# Altium PCB Arduino_Leonardo-REV3b.pcbdoc
Units mil, origin at the board's own origin, x right, y up, seen from the top; angles counter-clockwise.
Board outline 4223 x 2124.75 mil, 2 copper layers (Top Layer, Bottom Layer); 51 components, 53 nets, 275 pads, 91 vias.
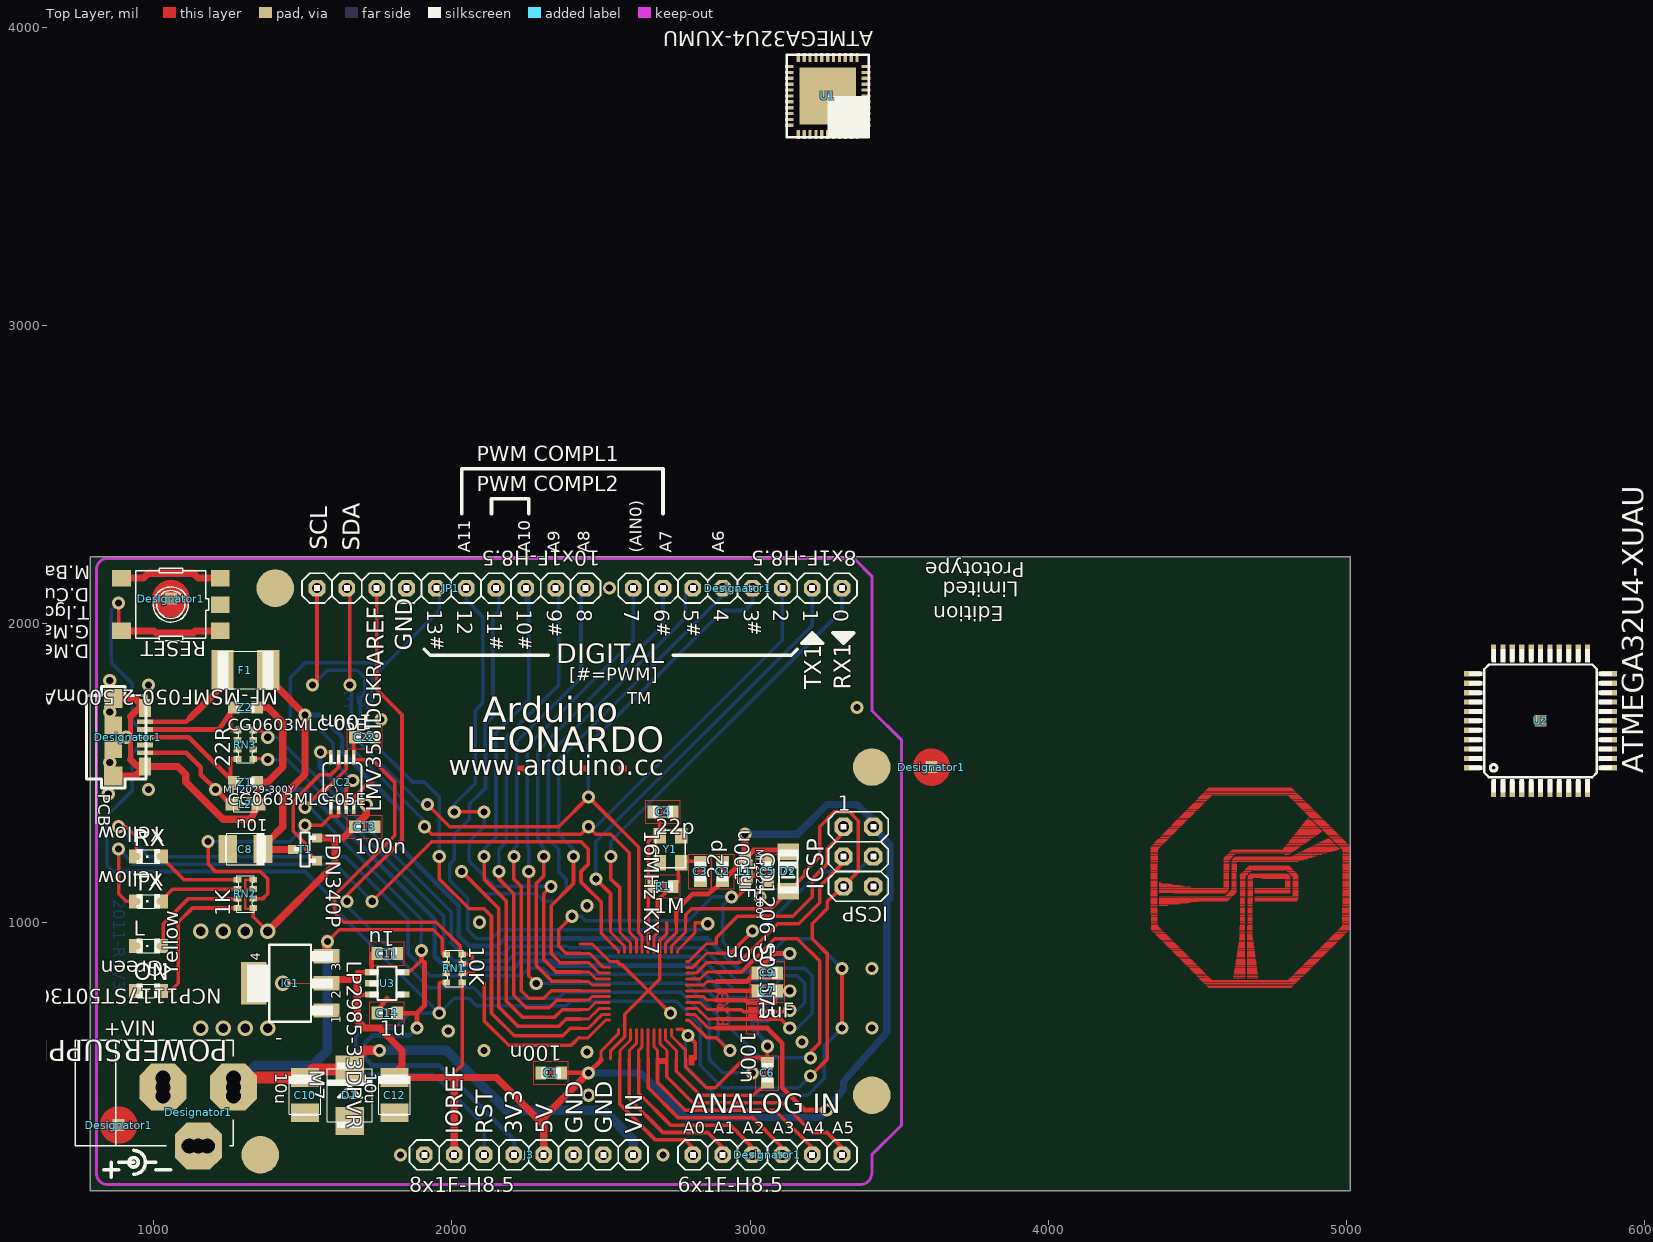
[diagram p0: Top Layer view]
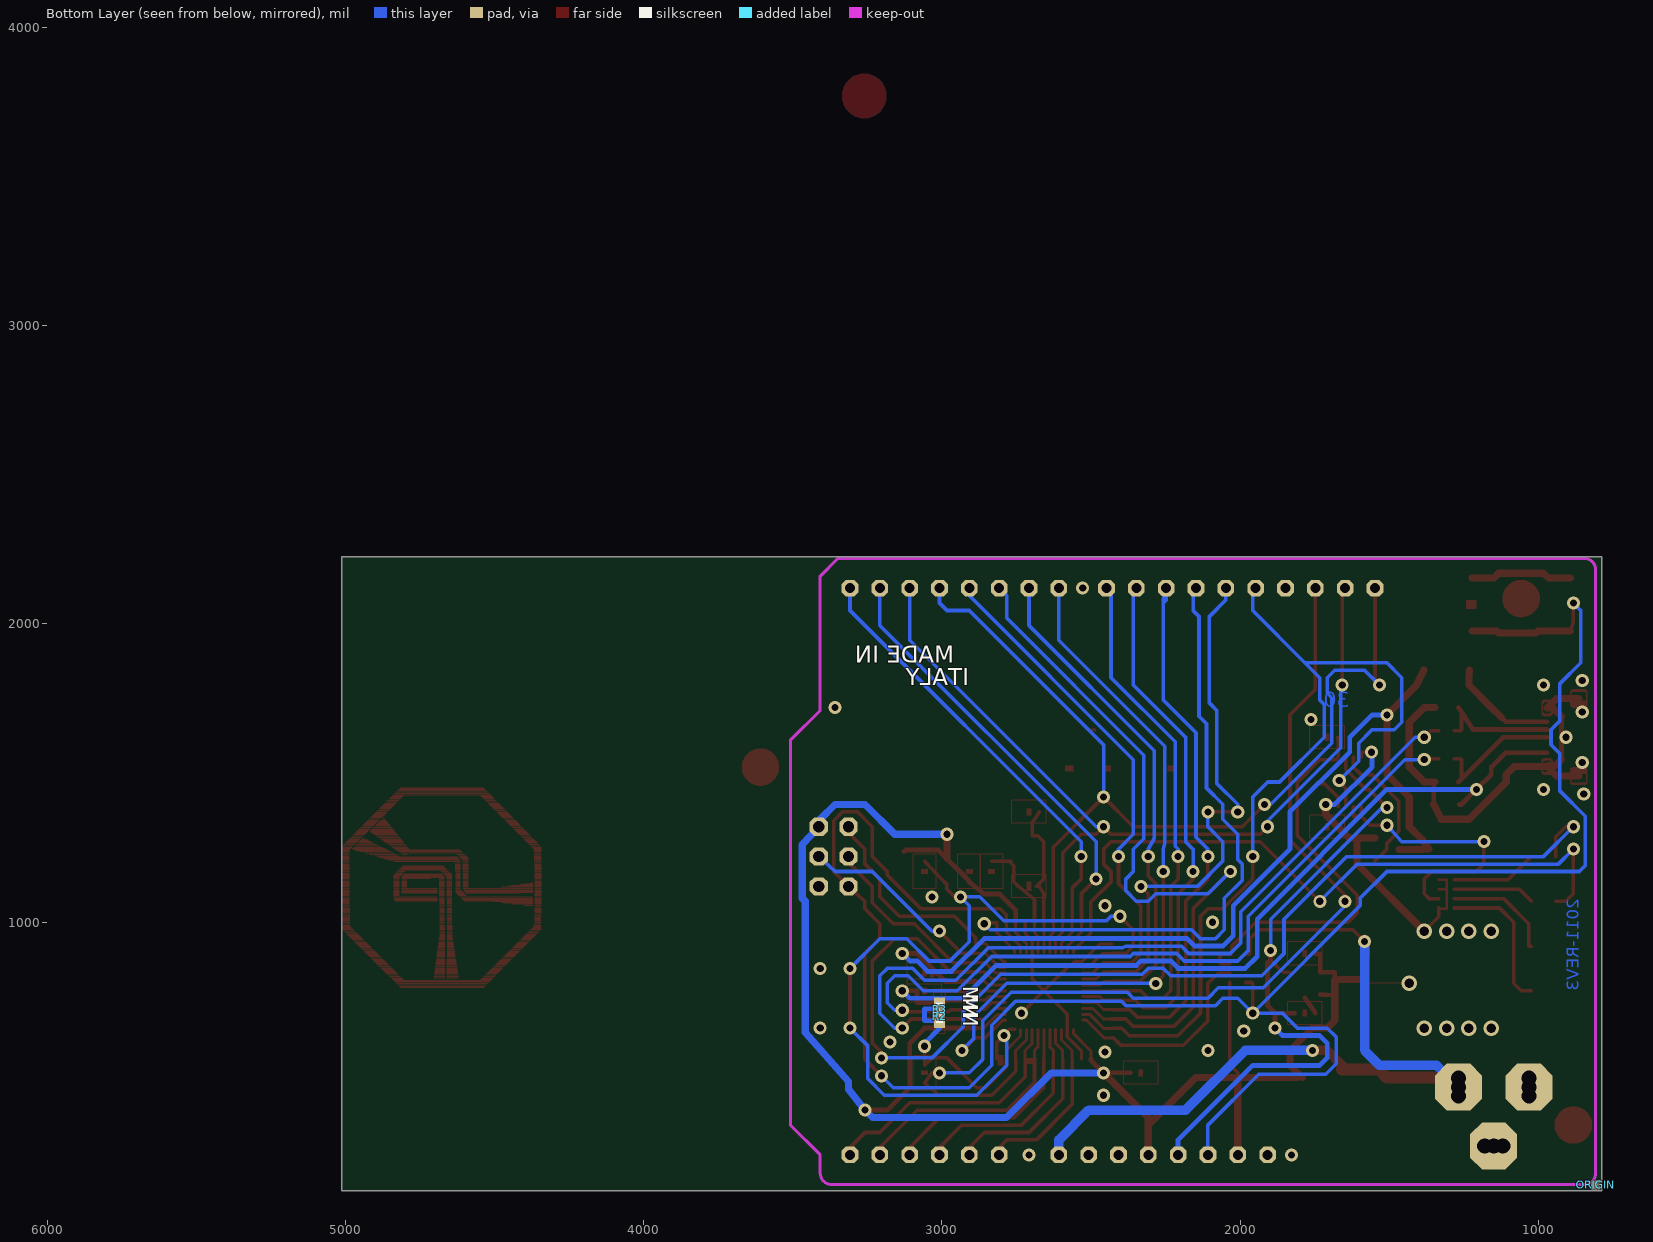
[diagram p1: Bottom Layer view, seen from below]

## Layer stack, top to bottom
Top Layer: signal copper 1.4
Dielectric: dielectric 12.6, FR-4, Dk 4.8
Bottom Layer: signal copper 1.4

## Board outline
788.23,100.25 5011.23,100.25 5011.23,2225 788.23,2225

## Design rules (kind name [scope] priority, off if disabled: settings)
Clearance [All] p1: gap=10
PolygonConnect [All] p1: connectstyle=Relief reliefconductorwidth=10 reliefentries=4 polygonreliefangle="90 Angle" airgapwidth=10
RoutingVias [All] p1: holewidth=28 width=50 viastyle="Through Hole" minholewidth=28 minwidth=50 maxholewidth=28 maxwidth=50
SilkscreenOverComponentPads [All] p1: minsilkscreentomaskgap=10
SolderMaskExpansion [All] p1: expansion=4
Width [All] p1: maxlimit=10 minlimit=10 preferedwidth=10
27 further rules are at their usual default settings.

## Components (designator, comment, footprint, x,y, rotation, side; value= is the part's Value field where it differs from the comment)
C1 "100n" C0603-ROUND 2332.98,495 r180 top
C2 "100n" C0603-ROUND 2907.98,1170 r90 top
C3 "22p" C0603-ROUND 2832.98,1170 r90 top
C4 "22p" C0603-ROUND 2707.98,1370 r0 top
C5 "1uF" C0603-ROUND 3057.98,1170 r270 top
C6 "100n" C0603-ROUND 3057.98,495 r270 top
C7 "1uF" C0603-ROUND 3057.98,770 r0 top
C8 "10u" SMC_B 1307.98,1245 r180 top
C9 "100n" C0603-ROUND 3057.98,830 r180 top
C10 "10u" SMC_B 1507.98,420 r270 top
C11 "1u" C0603-ROUND 1782.98,895 r180 top
C12 "10u" SMC_B 1807.98,420 r270 top
C13 "100n" C0603-ROUND 1707.98,1320 r0 top
C14 "1u" C0603-ROUND 1782.98,695 r0 top
C22 "100n" C0603-ROUND 1707.98,1620 r180 top
D1 "M7" SMB 1657.98,420 r270 top
D2 "CD1206-S01575" MINIMELF 3127.98,1170 r270 top
Designator1 "6x1F-H8.5" 1X06 3057.98,220 r0 top (schematic designator J4)
Designator1 "8x1F-H8.5" 1X08 2957.98,2120 r180 top (schematic designator J2)
Designator1 "Comment" CON2_USB_MICRO_B_AT 864.98,1620 r270 top (schematic designator J1)
Designator1 "Comment" FIDUCIA-MOUNT 882.98,320 r0 top (schematic designator FID3)
Designator1 "Comment" FIDUCIA-MOUNT 3607.98,1520 r0 top (schematic designator FID2)
Designator1 "Comment" FIDUCIA-MOUNT 1057.98,2085 r0 top (schematic designator FID1)
Designator1 "POWERSUPPLY_DC21MMX" POWERSUPPLY_DC-21MM 1017.98,450 r90 top (schematic designator EXTPOWER)
F1 "MF-MSMF050-2 500mA" L1812 1307.98,1845 r180 top
IC1 "NCP1117ST50T3G" SOT223 1457.98,795 r90 top
IC2 "LMV358IDGKR" MSOP08 1632.98,1470 r0 top
ICSP "Comment" 2X03 3362.98,1220 r270 top
J3 "8x1F-H8.5" 1X08 2257.98,220 r0 top
JP1 "10x1F-H8.5" 1X10 1997.98,2120 r180 top
L "Yellow" CHIPLED_0805 982.98,920 r90 top
L1 "MH2029-300Y" 0805 2982.98,1170 r270 top
L2 "MH2029-300Y" 0805 1307.98,1395 r0 top
ON "Green" CHIPLED_0805 982.98,770 r90 top
ORIGIN "Comment" TP-SP 807.98,120 r0 top
R1 "1M" R0603-ROUND 2707.98,1120 r0 top
R2 "NM" R0402 3007.98,684 r90 bottom
R3 "NM" R0402 3007.98,709 r90 bottom
RESET "Comment" TS42 1057.98,2065 r180 top
RN1 "10K" CAY16 2007.98,845 r270 top
RN2 "1K" CAY16 1307.98,1095 r90 top
RN3 "22R" CAY16 1307.98,1595 r90 top
RX "Yellow" CHIPLED_0805 982.98,1220 r90 top
T1 "FDN340P" SOT-23 1507.98,1245 r270 top
TX "Yellow" CHIPLED_0805 982.98,1070 r90 top
U1 "ATMEGA32U4-XUMU" QFN44ML7X7 3260,3770 r180 top
U2 "ATMEGA32U4-XUAU" TQFP44-PAD 5650,1675 r90 top
U3 "LP2985-33DBVR" SOT23-DBV 1782.98,795 r270 top
Y1 "16MHz KX-7" CRYSTAL-3.2-2.5 2732.98,1245 r270 top
Z1 "CG0603MLC-05E" CT/CN0603 1307.98,1470 r0 top
Z2 "CG0603MLC-05E" CT/CN0603 1307.98,1720 r0 top

## Footprints (in the part's own frame and the unit in brackets; to place one, negate y for a bottom-side part, rotate by r counter-clockwise, add the part's x,y. Pads: shape width x height; smd on the part's side, far side on the other; paste and mask are expansions set on the pad)
1X06 [mil]
  oct 56x56 hole 33.46: 1(-250,0) 2(-150,0) 3(-50,0) 4(50,0) 5(150,0) 6(250,0)
  silkscreen extent -300,-50 300,50
1X08 [mil]
  oct 56x56 hole 33.46: 1(-350,0) 2(-250,0) 3(-150,0) 4(-50,0) 5(50,0) 6(150,0) 7(250,0) 8(350,0)
  silkscreen extent -400,-50 400,50
1X10 [mil]
  oct 56x56 hole 33.46: 1(-450,0) 2(-350,0) 3(-250,0) 4(-150,0) 5(-50,0) 6(50,0) 7(150,0) 8(250,0) 9(350,0) 10(450,0)
  silkscreen extent -500,-50 500,50
2X03 [mm]
  oct 1.55x1.55 hole 0.95: 1(-2.54,-1.27) 2(-2.54,1.27) 3(0,-1.27) 4(0,1.27) 5(2.54,-1.27) 6(2.54,1.27)
  silkscreen extent -3.81,-2.54 3.81,2.54
0805 [mm]
  rect 1.2x1 smd: 1(-1.1,0) 2(1.1,0)
  silkscreen extent -1.3,-0.63 1.2,0.63
C0603-ROUND [mil]
  rect 35.37x43.31 smd: 1(-35,0) 2(35,0)
  Top Layer region: -7.87,-11.81 7.87,-11.81 7.87,11.81 -7.87,11.81
  Top Layer lines w2: 57.99,38.7 57.99,-38.7 -57.99,-38.7 -57.99,38.7 57.99,38.7
  silkscreen extent -33,-19 33,19
CAY16 [mm]
  rect 0.5x0.65 smd: 1(-1.2,-0.675) 2(-0.4,-0.675) 3(0.4,-0.675) 4(1.2,-0.675) 5(1.2,0.675) 6(0.4,0.675) 7(-0.4,0.675) 8(-1.2,0.675)
  silkscreen extent -1.55,-0.75 1.55,0.75
CHIPLED_0805 [mm]
  rect 1.2x1.2 smd: A(0,-1.05) C(0,1.05)
  silkscreen extent -0.63,-1 0.63,1
CON2_USB_MICRO_B_AT [mil]
  rect 16x53 smd: P1(-52,106) P2(-26,106) P3(0,106) P4(26,106) P5(52,106)
  rect 65x61 smd: S1(-130,0) S2(130,0)
  rect 60x40 smd: S3(-98,106) S4(98,106)
  rect 60x60 smd: S5(-40,0) S6(40,0)
  round 27.56 smd: ""(-138,-10) ""(-138,10) ""(-103,106) ""(-93,106) ""(93,106) ""(103,106) ""(138,-10) ""(138,10)
  Top Layer lines w5: -121,-25 -121,26 -117,26 ; 154,-23 154,23 ; -155,-23 -155,23 ; 106,23 106,-23 111,-23 111,23 116,23 116,-24 120,-24 ccw(c120,-23) 121,-23 121,24 ; -106,25 -106,-25 -108,-25 -108,25 -112,25 -112,-25 -117,-25 -117,26 ; -116,26 -117,26 ; 114,93 ccw(c114,98) 119,98 119,114 ccw(c114,114) 114,119 ; -82,93 ccw(c-82,98) -77,98 -77,114 ccw(c-82,114) -82,119 ; -114,93 cw(c-114,98) -119,98 -120,113 cw(c-114,113) -114,119 ; 81,94 cw(c81,99) 76,99 76,113 cw(c81,113) 81,118 ; 148,-27 ccw(c148,-17) 158,-17 158,17 ccw(c148,17) 148,27 112,27 ccw(c112,17) 102,17 102,-17 ccw(c112,-17) 112,-27 148,-27 ; -111,-27 ccw(c-111,-17) -101,-17 -101,17 ccw(c-111,17) -111,27 -149,27 ccw(c-149,17) -159,17 -159,-17 ccw(c-149,-17) -149,-27 -111,-27 ; 114,89 ccw(c114,99) 124,99 124,113 ccw(c114,113) 114,123 82,123 ccw(c82,113) 72,113 72,99 ccw(c82,99) 82,89 114,89 ; -82,89 ccw(c-82,99) -72,99 -72,113 ccw(c-82,113) -82,123 -114,123 ccw(c-114,113) -124,113 -124,99 ccw(c-114,99) -114,89 -82,89
  silkscreen extent -170,-90 290,110
CRYSTAL-3.2-2.5 [mm]
  rect 1.3x1.05 smd: 1(-1.15,-0.925) 2(1.15,-0.925) 3(1.15,0.925) 4(-1.15,0.925)
  silkscreen extent -1.6,-1.25 1.6,1.25
CT/CN0603 [mm]
  rect 1x1 smd: 1(-1,0) 2(1,0)
  silkscreen extent -0.75,-0.35 0.75,0.35
FIDUCIA-MOUNT [mil]
  rect 40x40 smd: P$1(0,0)
  Top Layer circle w5: c0,0 r59.06
  Top Layer circle w86: c0,0 r19.68
L1812 [mm]
  rect 1.9x3.4 smd: 1(-1.95,0) 2(1.95,0)
  silkscreen extent -2.39,-1.65 2.4,1.65
MINIMELF [mm]
  rect 1.4x1.8 smd: A(1.7,0) C(-1.7,0)
  silkscreen extent -1.85,-0.86 1.85,0.86
MSOP08 [mm]
  rect 0.3x1.2 smd: 1(-0.976,-2.113) 2(-0.326,-2.113) 3(0.324,-2.113) 4(0.974,-2.113) 5(0.974,2.112) 6(0.324,2.112) 7(-0.326,2.112) 8(-0.976,2.112)
  silkscreen extent -1.63,-2.36 1.62,2.36
POWERSUPPLY_DC-21MM [mm]
  oct 4x4 hole 1.3: 1(-5.08,-3.353) 2(-0.076,-6.35) 3(-0.076,-0.356)
  round 1.95 hole 1.3: 4(-5.08,-4.115) 5(-5.08,-2.591) 6(-0.838,-0.356) 7(0.686,-0.356) 8(-0.838,-6.35) 9(0.686,-6.35)
  silkscreen extent -5.08,-6.35 3.91,7.14
QFN44ML7X7 [mm]
  rect 0.75x0.275 smd: 1(-3.275,2.5) 2(-3.275,2) 3(-3.275,1.5) 4(-3.275,1) 5(-3.275,0.5) 6(-3.275,0) 7(-3.275,-0.5) 8(-3.275,-1) 9(-3.275,-1.5) 10(-3.275,-2) 11(-3.275,-2.5) 23(3.275,-2.5) 24(3.275,-2) 25(3.275,-1.5) 26(3.275,-1) 27(3.275,-0.5) 28(3.275,0) 29(3.275,0.5) 30(3.275,1) 31(3.275,1.5) 32(3.275,2) 33(3.275,2.5)
  rect 0.275x0.75 smd: 12(-2.5,-3.275) 13(-2,-3.275) 14(-1.5,-3.275) 15(-1,-3.275) 16(-0.5,-3.275) 17(0,-3.275) 18(0.5,-3.275) 19(1,-3.275) 20(1.5,-3.275) 21(2,-3.275) 22(2.5,-3.275) 34(2.5,3.275) 35(2,3.275) 36(1.5,3.275) 37(1,3.275) 38(0.5,3.275) 39(0,3.275) 40(-0.5,3.275) 41(-1,3.275) 42(-1.5,3.275) 43(-2,3.275) 44(-2.5,3.275)
  rect 4.826x4.826 smd: EXP(0,0)
  Top Layer circle w1.27: c0,0 r0.635
  Top Layer circle w2.54: c0,0 r0.635
  silkscreen extent -3.5,-3.5 3.5,3.5
R0402 [mm]
  rect 0.7x0.9 smd: 1(-0.65,0) 2(0.65,0)
  Bottom Layer region: -0.2,0.4 0.2,0.4 0.2,-0.4 -0.2,-0.4
  Bottom Layer lines w0.051: -1.473,-0.483 -1.473,0.483 1.473,0.483 1.473,-0.483 -1.473,-0.483
  silkscreen extent -0.55,-0.3 0.56,0.3
R0603-ROUND [mil]
  rect 35.37x43.31 smd: 1(-35,0) 2(35,0)
  Top Layer region: -7.87,-15.75 7.87,-15.75 7.87,15.75 -7.87,15.75
  Top Layer lines w2: -57.99,-38.7 -57.99,38.7 57.99,38.7 57.99,-38.7 -57.99,-38.7
  silkscreen extent -33,-17 33,17
SMB [mm]
  rect 2.4x2.4 smd: A(2.2,0) C(-2.2,0)
  silkscreen extent -2.79,-1.91 2.79,1.91
SMC_B [mm]
  rect 1.6x2.4 smd: +(-1.5,0) -(1.5,0)
  silkscreen extent -1.75,-1.35 1.75,1.35
SOT23-DBV [mm]
  rect 0.55x1.2 smd: 1(-0.95,-1.3) 2(0,-1.3) 3(0.95,-1.3) 4(0.95,1.3) 5(-0.95,1.3)
  silkscreen extent -1.42,-1.5 1.42,1.5
SOT223 [mil]
  rect 48x88 smd: 1(-91,-122) 2(0,-122) 3(91,-122)
  rect 141.73x86.61 smd: 4(0,122.01)
  silkscreen extent -129,-144 129,144
SOT-23 [mil]
  rect 31x35 smd: 1(1,-40) 2(-37,40) 3(39,40)
  silkscreen extent -56,-37 58,37
TP-SP [mm]
  rect 0.8x0.8 smd far side: X(0,0)
TQFP44-PAD [mm]
  rect 1.4x0.45 smd: 1(-5.8,4) 2(-5.8,3.2) 3(-5.8,2.4) 4(-5.8,1.6) 5(-5.8,0.8) 6(-5.8,0) 7(-5.8,-0.8) 8(-5.8,-1.6) 9(-5.8,-2.4) 10(-5.8,-3.2) 11(-5.8,-4) 23(5.8,-4) 24(5.8,-3.2) 25(5.8,-2.4) 26(5.8,-1.6) 27(5.8,-0.8) 28(5.8,0) 29(5.8,0.8) 30(5.8,1.6) 31(5.8,2.4) 32(5.8,3.2) 33(5.8,4)
  rect 0.45x1.4 smd: 12(-4,-5.8) 13(-3.2,-5.8) 14(-2.4,-5.8) 15(-1.6,-5.8) 16(-0.8,-5.8) 17(0,-5.8) 18(0.8,-5.8) 19(1.6,-5.8) 20(2.4,-5.8) 21(3.2,-5.8) 22(4,-5.8) 34(4,5.8) 35(3.2,5.8) 36(2.4,5.8) 37(1.6,5.8) 38(0.8,5.8) 39(0,5.8) 40(-0.8,5.8) 41(-1.6,5.8) 42(-2.4,5.8) 43(-3.2,5.8) 44(-4,5.8)
  rect 1x1 smd: P$1(0,0)
  silkscreen extent -6.1,-6.1 6.1,6.1
TS42 [mm]
  rect 1.6x1.4 smd: 1(-4.2,2.25) 2(4.2,2.25) 3(-4.2,-2.25) 4(4.2,-2.25) 5(-4.2,0)
  Top Layer region: -4.699,-0.381 -3.81,-0.381 -3.81,0.381 -4.699,0.381
  silkscreen extent -3.23,-3.09 2.98,3.09

## Free pads (board coordinates)
  round 125.98 smd: ""(1357.98,220) ""(1407.98,2120) ""(3407.98,420) ""(3407.98,1520)

## Via types
v1: diameter 44, hole 24, Top Layer to Bottom Layer, 82 vias
v2: diameter 52, hole 32, Top Layer to Bottom Layer, 9 vias

## Nets (pads, with @x,y where several pads share a name; then routed paths per layer and width w, separated by ;. In a path a pad name is that pad's centre, name@x,y a point inside that pad or via, vN(x,y) a via of type N, cw(c..) or ccw(c..) an arc to the next point about the centre after c; other vN are vias at no path point)
5-GND: RESET.5
+3V3: C14.2 IC2.6 J3.4 U3.5 | length 2210.6
  Top Layer w12: v1(1507.98,1385) 1567.98,1445 1577.98,1445 1645.74,1512.76 IC2.6 ; U3.5 1855.38,832.4 1897.98,870
  Top Layer w16: C14.2 1882.98,695 ; v1(1882.98,645) 1882.98,695 ; v1(1897.98,905) 1897.98,870 1907.98,865 1907.98,720 1882.98,695
  Bottom Layer w12: v1(1507.98,1385) 1512.98,1385 1517.98,1380 1527.98,1380 1897.98,1010 v1(1897.98,905)
  Bottom Layer w16: v1(1882.98,645) 1857.98,620 1732.98,620 1707.98,595 1707.98,545 1732.98,520 1957.98,520 2207.98,270 J3.4
+5V: C1.1 C2.1 C11.2 C12.+ C13.1 D2.C IC1.2 IC1.4 IC2.8 ICSP.2 J3.2 J3.5 L1.1 RN1.5 RN2.1 RN2.3 RN2.4 T1.2 U1.2 U1.14 U1.34 U2.2 U2.14 U2.34 U3.1 U3.3 | length 7729.5
  Top Layer w0.31: v2(1432.98,795) IC1.2
  Top Layer w8: RN2.1@1331.8,1045 1307.98,1045 1307.98,1110.75 ; RN2.3 1307.98,1110.75 ; RN2.4 1307.98,1142.24 1307.98,1110.75
  Top Layer w10: 2500.5,541.65 2500.5,568.52 2559.55,627.58 2559.55,641.06 ; 2717.04,898.94 2717.04,929.05 2752.47,964.49 2752.47,998.35 ; 2786.92,691.26 2813.72,691.26 2859.98,645 2885.34,645
  Top Layer w12: RN2.1@1331.8,1045 RN2.1 1334.55,1018.43 v2(1382.98,970) ; v1(1559.55,1570) 1594.55,1570 IC2.8 ; 2007.98,479.06 2007.98,495 2034.55,521.58 RN1.5 ; 2885.34,645 2886.33,644.02
  Top Layer w16: 1682.98,755 U3.3 ; 1682.98,807.6 1682.98,832.4 U3.1 1731.8,894.41 C11.2 ; C12.+@1792.04,479.06 C12.+ ; C1.1 v1(2457.98,495) 2500.5,537.52 2500.5,541.65 ; 2752.47,998.35 2752.47,1039.49 2807.98,1095 2858.57,1095 C2.1 2914.08,1144.41 L1.1 3011.6,1241.93 3121.05,1241.93 3122.98,1240 D2.C ; 2885.34,645 3057.98,645 3107.98,595 3107.98,445 3182.98,370 v1(3257.98,370)
  Top Layer w24: v2(1382.98,970) 1607.98,1195 1607.98,1272 1597.98,1282 ; T1.2 1597.98,1282 ; IC1.2 1592.58,807.6 1682.98,807.6 1682.98,755 1682.98,670 1707.98,645 1757.98,645 1832.98,570 1832.98,520 C12.+@1792.04,479.06 ; v1(1712.98,1395) 1712.98,1360 C13.1 1634.98,1282 1597.98,1282 ; C12.+ 2007.98,479.06 ; J3.2 2007.98,479.06 ; J3.5 2307.98,320 ; v1(2457.98,495) 2307.98,345 2307.98,320 ; L1.1 v1(2982.98,1295) ; 2007.98,479.06 2148.92,479.06 2307.98,320
  Bottom Layer w16: v1(1559.55,1570) 1557.98,1558.43 1557.98,1520 1682.98,1395 v1(1712.98,1395)
  Bottom Layer w24: v1(2457.98,495) 2632.98,495 2782.98,345 3232.98,345 v1(3257.98,370) 3312.98,440 3312.98,465 3457.98,630 3457.98,1070 3467.98,1080 3467.98,1260 ICSP.2 3407.98,1345 3357.98,1395 3257.98,1395 3157.98,1295 v1(2982.98,1295)
  other v2: 1157.98,645 1232.98,645 1307.98,645 1382.98,645 1157.98,970 1232.98,970 1307.98,970
A0: Designator1.1@2807.98,220 U1.36 U2.36 | length 595.6
  Top Layer w10: 2563.49,541.65 2563.49,569.51 2598.92,604.95 2598.92,641.06
  Top Layer w12: 2563.49,541.65 2563.49,389.49 2682.98,270 2782.98,270 2807.98,245 Designator1.1@2807.98,220
A1: Designator1.2@2907.98,220 U1.37 U2.37 | length 648.4
  Top Layer w10: 2594.99,541.65 2594.99,570.01 2618.61,593.63 2618.61,641.06
  Top Layer w12: 2594.99,541.65 2594.99,407.99 2707.98,295 2857.98,295 2907.98,245 Designator1.2@2907.98,220
A2: Designator1.3@3007.98,220 U1.38 U2.38 | length 701.1
  Top Layer w10: 2626.48,541.65 2626.48,570.5 2638.29,582.32 2638.29,641.06
  Top Layer w12: 2626.48,541.65 2626.48,426.5 2732.98,320 2932.98,320 3007.98,245 Designator1.3@3007.98,220
A3: Designator1.4@3107.98,220 U1.39 U2.39 | length 753.9
  Top Layer w10: 2657.98,541.65 2657.98,641.06
  Top Layer w12: 2657.98,541.65 2657.98,445 2757.98,345 3007.98,345 3107.98,245 Designator1.4@3107.98,220
A4: Designator1.5@3207.98,220 U1.40 U2.40 | length 816.5
  Top Layer w10: 2677.66,641.06 2677.66,582.32 2689.48,570.5 2689.48,541.65
  Top Layer w12: 2689.48,541.65 2689.48,463.5 2782.98,370 3082.98,370 3207.98,245 Designator1.5@3207.98,220
A5: Designator1.6@3307.98,220 U1.41 U2.41 | length 879
  Top Layer w10: 2697.35,641.06 2697.35,593.63 2720.97,570.01 2720.97,541.65
  Top Layer w12: 2720.97,541.65 2720.97,482.01 2807.98,395 3107.98,395 3207.98,295 3257.98,295 3307.98,245 Designator1.6@3307.98,220
AGND: C6.1 R2.1 U1.43 U2.43 | length 659.7
  Top Layer w10: 2736.72,641.06 2736.72,618.26 2783.96,571.02 2783.96,541.65
  Top Layer w12: 2783.96,541.65 2783.96,514.02 2852.98,445 2882.98,445 2982.98,545 3032.98,545 3057.39,520 C6.1 v1(3057.98,584)
  Bottom Layer w16: R2.1 3007.98,645 3057.98,595 v1(3057.98,584)
AREF: C6.2 JP1.8 U1.42 U2.42 | length 3438
  Top Layer w10: 2717.04,641.06 2717.04,604.95 2752.47,569.51 2752.47,541.65
  Top Layer w12: v1(1647.98,1070) 1647.98,1090 1832.98,1275 1832.98,1695 1747.98,1780 JP1.8 ; 2752.47,541.65 2752.47,500.51 2832.98,420 3008.57,420 C6.2 3033.57,495 v1(3007.98,495)
  Bottom Layer w12: v1(1647.98,1070) 1647.98,1055 1922.98,780 2072.98,780 2107.98,745 2357.98,745 2377.98,765 2767.98,765 2862.98,670 2862.98,540 2907.98,495 v1(3007.98,495)
AVCC: C5.1 L1.2 U1.24 U1.44 U2.24 U2.44 | length 2894.4
  Top Layer w10: 2429.63,895.98 2430.62,895 2461.98,895 2507.98,849 2523.3,849 2529.04,848.74
  Top Layer w12: v1(2402.98,1020) 2357.98,975 2357.98,920 2382,895.98 2429.63,895.98 ; 2756.41,641.06 2772.92,641.06 v1(2791.98,620) 2815.46,596.52 2815.46,541.65 ; v1(2937.98,1085) 2957.98,1085 2982.98,1110 L1.2 3000.7,1144.41 C5.1 ; v1(3307.98,645) v1(3307.98,845)
  Bottom Layer w12: v1(2402.98,1020) 2432.98,1020 2447.98,1005 2792.98,1005 2872.98,1085 v1(2937.98,1085) 2907.98,1055 2907.98,935 2972.98,870 3042.98,870 3117.98,945 3207.98,945 v1(3307.98,845) ; v1(2791.98,620) 2782.98,595 2782.98,520 2882.98,420 3192.98,420 3247.98,475 3247.98,585 v1(3307.98,645)
CMP: C22.2 IC2.5 RN1.7 RN1.8 | length 1353.5
  Top Layer w12: C22.2 1672.98,1614.8 1671.33,1613.15 IC2.5 1679.48,1545 1732.98,1545 1807.98,1470 1807.98,1290 1607.98,1090 1607.98,1030 1637.98,1000 1947.98,1000 2027.98,920 2027.98,898.82 RN1.8 ; RN1.8@2030.22,892.24 RN1.8 ; RN1.7 2063.73,860.75 2067.98,865 2067.98,885 2060.74,892.24 RN1.8
D0/RX: Designator1.1@3307.98,2120 U1.20 U2.20 | length 1569.4
  Top Layer w10: 2563.49,998.35 2563.49,965.49 2598.92,930.05 2598.92,898.94
  Top Layer w12: v1(2532.98,1220) 2532.98,1145 2563.49,1114.49 2563.49,998.35
  Bottom Layer w12: v1(2532.98,1220) 2532.98,1270 3307.98,2045 Designator1.1@3307.98,2120
D1/TX: Designator1.2@3207.98,2120 U1.21 U2.21 | length 1561.2
  Top Layer w10: 2532,998.35 2532,966.98 2579.24,919.74 2579.24,898.94
  Top Layer w12: v1(2482.98,1145) 2532,1095.98 2532,998.35
  Bottom Layer w12: v1(2482.98,1145) 2482.98,1270 3207.98,1995 Designator1.2@3207.98,2120
D2/SDA: Designator1.3@3107.98,2120 JP1.9 U1.19 U2.19 | length 3079.2
  Top Layer w10: 2594.99,998.35 2594.99,966.99 2618.61,943.37 2618.61,898.94
  Top Layer w12: JP1.9 1657.98,2110 v1(1657.98,1795) ; v1(1907.98,1320) 1932.98,1295 2432.98,1295 v1(2457.98,1320) 2482.98,1295 2532.98,1295 2594.99,1232.99 2594.99,998.35
  Bottom Layer w12: v1(1657.98,1795) 1657.98,1790 1662.98,1785 1662.98,1585 1907.98,1340 v1(1907.98,1320) ; v1(2457.98,1320) 2482.98,1320 3107.98,1945 Designator1.3@3107.98,2120
D3/SCL: Designator1.4@3007.98,2120 JP1.10 U1.18 U2.18 | length 3252.2
  Top Layer w10: 2626.48,998.35 2626.48,964.5 2638.29,952.68 2638.29,898.94
  Top Layer w12: v1(1532.98,1795) 1547.98,1810 JP1.10 ; v1(1917.98,1395) 1992.98,1320 2357.98,1320 v1(2457.98,1420) 2626.48,1251.5 2626.48,998.35
  Bottom Layer w12: v1(1532.98,1795) 1582.98,1845 1682.98,1845 1707.98,1820 1707.98,1770 1692.98,1750 1692.98,1600 1897.98,1395 v1(1917.98,1395) ; v1(2457.98,1420) 2457.98,1595 2907.98,2045 2982.98,2045 3007.98,2070 Designator1.4@3007.98,2120
D4: Designator1.5@2907.98,2120 U1.25 U2.25 | length 1728
  Top Layer w10: 2429.63,864.49 2459.49,864.49 2494.92,829.05 2529.04,829.05
  Top Layer w12: v1(2407.98,1220) 2407.98,1130 2332.98,1055 2332.98,895 2363.49,864.49 2429.63,864.49
  Bottom Layer w12: v1(2407.98,1220) 2407.98,1245 2357.98,1295 2357.98,1545 2907.98,2095 Designator1.5@2907.98,2120
D5*: Designator1.6@2807.98,2120 U1.31 U2.31 | length 2576.2
  Top Layer w10: 2429.63,675.51 2458.49,675.51 2493.92,710.95 2529.04,710.95
  Top Layer w12: v1(2032.98,1170) 2157.98,1045 2157.98,715 2222.47,650.51 2358.49,650.51 2383.49,675.51 2429.63,675.51
  Bottom Layer w12: v1(2032.98,1170) 2107.98,1095 2282.98,1095 2307.98,1070 2347.98,1070 2382.98,1105 2382.98,1145 2357.98,1170 2357.98,1245 2322.98,1280 2322.98,1560 2782.98,2020 2782.98,2095 Designator1.6@2807.98,2120
D6*: Designator1.7@2707.98,2120 U1.27 U2.27 | length 1727.8
  Top Layer w10: 2429.63,801.5 2458.48,801.5 2470.29,789.68 2529.04,789.68
  Top Layer w12: v1(2307.98,1220) 2307.98,1155 2282.98,1130 2282.98,855 2336.48,801.5 2429.63,801.5
  Bottom Layer w12: v1(2307.98,1220) 2307.98,1245 2287.98,1280 2287.98,1575 2707.98,1995 Designator1.7@2707.98,2120
D7: Designator1.8@2607.98,2120 U1.1 U2.1 | length 2458.3
  Top Layer w12: v1(2257.98,1170) 2257.98,820 v1(2282.98,795) ; 2786.92,671.58 2796.41,671.58 2855.46,612.52 2886.33,612.52 2928.85,570 v1(2932.98,570)
  Bottom Layer w12: v1(2257.98,1170) 2257.98,1245 2252.98,1265 2252.98,1590 2607.98,1945 Designator1.8@2607.98,2120 ; v1(2282.98,795) 2782.98,795 2892.98,685 2892.98,610 v1(2932.98,570)
D+: Designator1.P3 RN3.8 Z1.1 | length 462.8
  Top Layer w12: Z1.1 1257.98,1484.37 1257.98,1545 1260.74,1547.76 RN3.8
  Top Layer w16: Designator1.P3 1117.98,1620 1192.98,1545 1193.61,1545 Z1.1
D-: Designator1.P2 RN3.5 Z2.1 | length 440.5
  Top Layer w12: Z2.1 1257.98,1705.63 1257.98,1645 1260.74,1642.24 RN3.5
  Top Layer w16: Designator1.P2 1219.61,1646 Z2.1
GATE_CMD: IC2.7 T1.3 | length 465.7
  Top Layer w12: T1.3 1546.98,1206 1507.98,1245 1507.98,1265 1467.98,1305 1467.98,1405 1557.98,1495 1595.15,1495 1620.15,1520 IC2.7
GND: C1.2 C2.2 C3.1 C4.2 C5.2 C8.- C9.1 C10.- C11.1 C12.- C13.2 C14.1 C22.1 D1.A Designator1.1@1149.98,250 Designator1.3@1031.98,447 Designator1.S1 Designator1.S2 Designator1.S3 Designator1.S4 Designator1.S5 Designator1.S6 IC1.1 IC2.4 ICSP.6 J3.6 J3.7 JP1.7 L2.2 L.C ON.C R2.2 R3.1 RESET.3 RESET.4 RN1.2 RN1.3 U1.15 U1.23 U1.35 U1.EXP U2.15 U2.23 U2.35 U2.P$1 U3.2 Y1.2 Y1.4 Z1.2 Z2.2 | length 3071.3
  Top Layer w10: 2429.63,927.48 2469.99,927.48 2529.04,868.42
  Top Layer w11: 2529.04,868.42 2553.55,868.42 ; 2532,541.65 2532,569.02 2579.24,616.26 2579.24,641.06 2579.24,691.26 ; 2697.35,809.37 2697.35,898.94 2697.35,938.37 2720.97,961.99 2720.97,998.35
  Top Layer w12: Designator1.S4@967.98,1525 Designator1.S4 ; IC2.4 1671.33,1418.35 1717.98,1465 1732.98,1465 ; 2553.55,868.42 2563.98,858 2569.98,858 2657.98,770 ; 2579.24,691.26 2657.98,770 ; 2697.35,809.37 2657.98,770 ; v1(2732.98,695) 2657.98,770
  Top Layer w16: 922.98,1545 922.98,1690 ; Z1.2 1351.29,1466.06 L2.2 ; C14.1 1782.98,745.59
  Top Layer w24: Designator1.S2 938.98,1490 Designator1.S4 1080.98,1522 1107.98,1495 1107.98,1470 1232.98,1345 1326.29,1345 L2.2 ; Designator1.S1 938.98,1750 Designator1.S3 950.98,1718 922.98,1690 ; RESET.4 966.56,2153.58 982.98,2170 1132.98,2170 1149.4,2153.58 RESET.3 ; 922.98,1545 942.98,1525 Designator1.S4@967.98,1525 ; Z1.2 1382.98,1470 1432.98,1520 1432.98,1670 1382.98,1720 Z2.2
  Bottom Layer w16: R3.1@3007.98,670 R3.1 R2.2 3057.98,709.59 3057.98,670 R3.1@3007.98,670
  other v1: 1827.98,220 2707.98,220 2457.98,420 2452.98,565 2107.98,570 3173.98,598 1987.98,635 3407.98,645 3407.98,845 2092.98,1000 2452.98,1055 3032.98,1085 847.98,1430 982.98,1445 852.98,1535 907.98,1620 1762.98,1680 852.98,1705 3357.98,1720 982.98,1795 852.98,1810 2527.98,2120
HWB: RN1.6 U1.33 U2.33 | length 702.7
  Top Layer w10: 2429.63,612.52 2456.5,612.52 2515.55,671.58 2529.04,671.58
  Top Layer w12: RN1.6 2073.73,829.25 2107.98,795 2107.98,670 2190.46,587.52 2400.5,587.52 2407.98,595 2425.5,612.52 2429.63,612.52
IO8: JP1.1 U1.28 U2.28 | length 1776.5
  Top Layer w10: 2429.63,770 2529.04,770
  Top Layer w12: v1(2207.98,1220) 2207.98,1145 2232.98,1120 2232.98,770 2257.98,745 2307.98,745 2332.98,770 2429.63,770
  Bottom Layer w12: v1(2207.98,1220) 2207.98,1245 2217.98,1255 2217.98,1605 2432.98,1820 2432.98,2105 JP1.1
IO9*: JP1.2 U1.29 U2.29 | length 1826.2
  Top Layer w10: 2429.63,738.5 2458.48,738.5 2470.29,750.32 2529.04,750.32
  Top Layer w12: v1(2157.98,1170) 2157.98,1145 2207.98,1095 2207.98,755 2249.48,713.5 2326.48,713.5 2351.48,738.5 2429.63,738.5
  Bottom Layer w12: v1(2157.98,1170) 2157.98,1245 2182.98,1270 2182.98,1620 2357.98,1795 2357.98,2110 JP1.2
IO10*: JP1.3 U1.30 U2.30 | length 1899.6
  Top Layer w10: 2429.63,707.01 2457.99,707.01 2481.61,730.63 2529.04,730.63
  Top Layer w12: v1(2107.98,1220) 2107.98,1145 2182.98,1070 2182.98,735 2235.97,682.01 2344.99,682.01 2369.99,707.01 2429.63,707.01
  Bottom Layer w12: v1(2107.98,1220) 2107.98,1245 2147.98,1285 2147.98,1635 2257.98,1745 2257.98,2085 JP1.3@2247.98,2095 ; JP1.3 JP1.3@2247.98,2095 ; 2257.98,2070 2247.98,2080 JP1.3@2247.98,2095
IO11*: JP1.4 U1.12 U2.12 | length 2254.9
  Top Layer w10: 2756.41,898.94 2756.41,905.42 2815.46,964.48 2815.46,998.35
  Top Layer w12: 2815.46,998.35 2861.33,998.35 v1(2857.98,995)
  Bottom Layer w12: JP1.4 2157.98,2110 2157.98,2045 2137.98,2025 2137.98,1690 2112.98,1665 2112.98,1450 2057.98,1395 2057.98,1345 2007.98,1295 2007.98,1210 1992.98,1195 1992.98,1140 2052.98,1080 2052.98,975 2082.98,945 2132.98,945 2162.98,975 2837.98,975 v1(2857.98,995)
IO12: JP1.5 U1.26 U2.26 | length 1911.7
  Top Layer w10: 2429.63,832.99 2459.99,832.99 2483.61,809.37 2529.04,809.37
  Top Layer w12: v1(2007.98,1370) v1(2107.98,1370) ; v1(2332.98,1120) 2307.98,1095 2307.98,875 2349.99,832.99 2429.63,832.99
  Bottom Layer w12: v1(2007.98,1370) 2007.98,1395 2077.98,1465 2077.98,1710 2102.98,1735 2102.98,2025 2047.98,2080 JP1.5 ; v1(2107.98,1370) 2107.98,1320 2057.98,1270 2057.98,1205 2142.98,1120 v1(2332.98,1120)
IO13*: IC2.3 JP1.6 U1.32 U2.32 | length 3128.4
  Top Layer w10: 2429.63,644.02 2457,644.02 2504.24,691.26 2529.04,691.26
  Top Layer w12: IC2.3 1645.74,1447.76 v1(1667.98,1475) ; v1(1957.98,1220) 1957.98,1145 2057.98,1045 2107.98,1045 2132.98,1020 2132.98,695 2208.96,619.02 2372,619.02 2397,644.02 2429.63,644.02
  Bottom Layer w12: v1(1667.98,1475) 1602.98,1540 1602.98,1600 1557.98,1645 1482.98,1645 1457.98,1670 1457.98,1820 1507.98,1870 1782.98,1870 ; JP1.6 1957.98,2110 1957.98,2045 1782.98,1870 ; v1(1957.98,1220) 1957.98,1420 1907.98,1470 1867.98,1470 1717.98,1620 1717.98,1730 1732.98,1745 1732.98,1820 1782.98,1870
LL: IC2.1 IC2.2 RN2.2 | length 938.2
  Top Layer w12: v1(1182.98,1270) 1182.98,1195 1207.98,1170 1357.98,1170 1382.98,1145 1382.98,1095 1367.23,1079.25 RN2.2 ; v1(1507.98,1325) 1564.55,1325 1594.55,1355 ; IC2.1 1594.55,1355 ; IC2.2 1620.15,1355 1594.55,1355
  Bottom Layer w12: v1(1182.98,1270) 1457.98,1270 v1(1507.98,1325)
MISO: ICSP.1 U1.11 U2.11 | length 801.7
  Top Layer w10: 2786.92,868.42 2794.41,868.42 2853.98,928 2886.33,927.48
  Top Layer w12: 2886.33,927.48 2886.33,948.35 2957.98,1020 3142.98,1020 3207.98,1085 3207.98,1145 3257.98,1195 3257.98,1245 3312.98,1300 ICSP.1
MOSI: ICSP.4 U1.10 U2.10 | length 778.1
  Top Layer w10: 2786.92,848.74 2807.72,848.74 2853.98,895 2886.33,895.98
  Top Layer w12: 2886.33,895.98 2933.96,895.98 v1(3007.98,970)
  Bottom Layer w12: v1(3007.98,970) 3032.98,970 3232.98,1170 3357.98,1170 ICSP.4
N$2: L.A RN2.7 | length 367
  Top Layer w12: L.A 1032.98,920 1032.98,995 1117.23,1079.25 RN2.7
N$3: ON.A RN2.8 | length 492.2
  Top Layer w12: ON.A 1057.98,770 1082.98,795 1082.98,1000 1130.74,1047.76 RN2.8
N$6: RN2.6 TX.A | length 274.8
  Top Layer w12: TX.A 1024.32,1071.38 1063.69,1110.75 RN2.6
N$8: RN2.5 RX.A | length 289.3
  Top Layer w12: RX.A 1102.07,1142.24 RN2.5
RD+: RN3.1 U1.4 U2.4 | length 2780.1
  Top Layer w10: 2786.92,730.63 2832.35,730.63 2855.97,707.01 2886.33,707.01
  Top Layer w12: RN3.1 1380.22,1547.76 v1(1382.98,1545) ; 2886.33,707.01 2970.97,707.01 2977.98,700 3127.98,700 v1(3132.98,705) v1@3129.99,702.01
  Bottom Layer w12: v1(1382.98,1545) 1447.98,1545 1972.98,1020 1972.98,905 2007.98,870 2187.98,870 2212.98,895 2357.98,895 2367.98,885 2832.98,885 2947.98,770 3062.98,770 3112.98,820 3157.98,820 3182.98,795 3182.98,730 3157.98,705 v1(3132.98,705)
RD-: RN3.4 U1.3 U2.3 | length 2922.6
  Top Layer w10: 2786.92,710.95 2823.04,710.95 2858.47,675.51 2886.33,675.51
  Top Layer w12: RN3.4 1360.74,1642.24 v1(1382.98,1620) ; 2886.33,675.51 3102.47,675.51 v1(3132.98,645)
  Bottom Layer w12: v1(1382.98,1620) 1412.98,1620 1997.98,1035 1997.98,930 2032.98,895 2172.98,895 2197.98,920 2382.98,920 2392.98,915 2842.98,915 2952.98,805 3057.98,805 3097.98,845 3182.98,845 3207.98,820 3207.98,695 3157.98,645 v1(3132.98,645)
RESET: D2.A ICSP.5 J3.3 RESET.1 RESET.2 RN1.4 U1.13 U2.13 | length 7295.7
  Top Layer w10: 2736.72,898.94 2736.72,919.74 2783.96,966.98 2783.96,998.35
  Top Layer w12: v1(882.98,2070) 882.98,2006.06 RESET.2 ; v1(1957.98,695) 1957.98,795 1960.74,797.76 RN1.4 ; 2783.96,998.35 2783.96,1024.98 2803.98,1045 3069.91,1045 D2.A 3182.98,1158.07 3182.98,1170 3232.98,1220 3232.98,1320 3282.98,1370 3332.98,1370 3362.98,1340 3362.98,1170 ICSP.5 3257.98,1070 3257.98,1045 3207.98,995 3207.98,945 3257.98,895 3257.98,540 v1(3202.98,485)
  Top Layer w24: RESET.2 1001.56,1976.42 1007.98,1970 1132.98,1970 1139.4,1976.42 RESET.1
  Bottom Layer w12: v1(882.98,2070) 857.98,2045 857.98,1870 927.98,1800 927.98,1675 957.98,1645 957.98,1595 927.98,1565 927.98,1440 842.98,1355 842.98,1190 862.98,1170 1507.98,1170 1597.98,1080 1597.98,1055 v1(1957.98,695) ; J3.3 2107.98,320 1937.98,490 1712.98,490 1677.98,525 1677.98,615 1707.98,645 1807.98,645 1857.98,695 v1(1957.98,695) ; v1(3202.98,485) 3162.98,445 2907.98,445 2832.98,520 2832.98,655 2752.98,735 2397.98,735 2382.98,720 2082.98,720 2057.98,745 2007.98,745 v1(1957.98,695)
RXLED: RX.C U1.8 U2.8 | length 3768.1
  Top Layer w10: 2786.92,809.37 2832.35,809.37 2855.97,832.99 2886.33,832.99
  Top Layer w12: v1(882.98,1320) 907.98,1320 941.64,1286.34 RX.C ; 2886.33,832.99 2970.97,832.99 3082.98,945 3157.98,945 3232.98,870 3232.98,595 3202.98,565 v1(3202.98,545)
  Bottom Layer w12: v1(882.98,1320) 982.98,1220 1642.98,1220 1852.98,1010 1852.98,895 1927.98,820 2232.98,820 2257.98,845 2307.98,845 2327.98,825 2802.98,825 2927.98,700 2927.98,650 3032.98,545 v1(3202.98,545)
SCK: ICSP.3 U1.9 U2.9 | length 731.9
  Top Layer w10: 2786.92,829.05 2819.04,829.05 2854.47,864.49 2886.33,864.49
  Top Layer w12: 2886.33,864.49 2962.47,864.49 3092.98,995 3162.98,995 3232.98,1065 3232.98,1120 3312.98,1200 ICSP.3
TXLED: TX.C U1.22 U2.22 | length 2376.6
  Top Layer w10: 2559.55,898.94 2559.55,903.42
  Top Layer w11: 2500.5,998.35 2500.5,962.48 2542.02,920.97 2559.55,903.42
  Top Layer w12: v1(882.98,1245) 882.98,1095 907.98,1070 TX.C ; v1(1732.98,1070) 1932.98,1270 2432.98,1270 2457.98,1245 2457.98,1195 2432.98,1170 2432.98,1135 2500.5,1067.48 2500.5,998.35 ; 2542.02,920.97 2547.74,915.24
  Bottom Layer w12: v1(882.98,1245) 932.98,1195 1607.98,1195 v1(1732.98,1070)
UCAP: C7.1 U1.6 U2.6 | length 236.1
  Top Layer w10: 2786.92,770 2886.33,770
  Top Layer w16: 2886.33,770 C7.1
UGND: C7.2 Designator1.P5 L2.1 R3.2 U1.5 U2.5 | length 3107.9
  Top Layer w10: 2786.92,750.32 2843.66,750.32 2855.48,738.5 2886.33,738.5
  Top Layer w16: Designator1.P5 1109.98,1568 1157.98,1520 1157.98,1495 v1(1207.98,1445) 1257.98,1395 L2.1 ; 2886.33,738.5 2984.48,738.5 2992.98,730 3082.98,730 3082.98,769.41 C7.2 v1(3132.98,770)
  Bottom Layer w16: v1(1207.98,1445) 1507.98,1445 1942.98,1010 1942.98,885 1982.98,845 2207.98,845 2232.98,870 2332.98,870 2347.98,855 2817.98,855 2927.98,745 2997.57,745 R3.2 3007.98,745 3107.98,745 v1(3132.98,770)
USBID: Designator1.P4
VIN: C10.+ D1.C Designator1.2@1267.98,447 IC1.3 J3.8 RN1.1 | length 2918.6
  Top Layer w12: v1(1582.98,935) 1622.98,975 1937.98,975 1967.98,945 1967.98,895 1970.74,892.24 RN1.1
  Top Layer w16: IC1.3 1582.98,889 v1(1582.98,935)
  Top Layer w32: IC1.3 1579.98,942 v1(1582.98,935) ; D1.C 1657.98,520 1707.98,570 v1(1757.98,570)
  Top Layer w40: Designator1.2@1267.98,447 1299.48,478.5 1348.92,479.06 C10.+ ; C10.+@1485.54,479.06 C10.+ ; D1.C 1535.54,506.61 C10.+
  Bottom Layer w32: Designator1.2@1267.98,447 1340.98,520 1532.98,520 1582.98,570 v1(1582.98,935) ; v1(1757.98,570) 1982.98,570 2182.98,370 2507.98,370 2607.98,270 J3.8
VUSB: C8.+ C9.2 F1.1 T1.1 U1.7 U2.7 | length 3437.3
  Top Layer w10: 2786.92,789.68 2844.66,789.68 2856.48,801.5 2886.33,801.5
  Top Layer w12: C9.2 C9.2@3032.98,820.59
  Top Layer w16: 2886.33,801.5 2989.48,801.5 C9.2@3032.98,845 ; C9.2 C9.2@3032.98,845 ; C9.2@3032.98,820.59 C9.2@3032.98,845 ; v1(3132.98,895) 3082.98,895 C9.2@3032.98,845
  Top Layer w24: F1.1 1409.75,1793.23 v1(1507.98,1695) 1507.98,1495 1432.98,1420 1432.98,1320 1392.04,1279.06 C8.+ 1393.04,1244 T1.1
  Bottom Layer w16: v1(1507.98,1695) 1557.98,1695 1632.98,1620 1632.98,1570 1832.98,1370 1832.98,1245 2022.98,1055 2022.98,955 2057.98,920 2152.98,920 2177.98,945 2857.98,945 2967.98,835 3047.98,835 3082.98,870 3107.98,870 v1(3132.98,895)
XTAL1: C4.1 R1.1 U1.17 U2.17 Y1.1 | length 529.3
  Top Layer w10: 2657.98,898.94 2657.98,998.35
  Top Layer w12: 2657.98,998.35 2657.98,1094.41 R1.1 2682.98,1120 2657.98,1145 2657.98,1270 2678.26,1290.28 Y1.1 2696.56,1334.17 C4.1
XTAL2: C3.2 R1.2 U1.16 U2.16 Y1.3 | length 410.7
  Top Layer w10: 2677.66,898.94 2677.66,952.68 2689.48,964.5 2689.48,998.35
  Top Layer w12: 2689.48,998.35 2689.48,1075.91 R1.2 2758.57,1135.59 2758.57,1188.9 Y1.3 2769.4,1205 C3.2
XUSB: Designator1.P1 F1.2 | length 411.1
  Top Layer w16: Designator1.P1 1109.98,1672 1157.98,1720
  Top Layer w24: 1123.96,1685.98 1157.98,1720 1232.98,1795 1232.98,1821.77 F1.2
pads on no net: Designator1. Designator1.4@1179.98,250 Designator1.5@1119.98,250 Designator1.6@1031.98,417 Designator1.7@1031.98,477 Designator1.8@1267.98,417 Designator1.9 Designator1.P$1 J3.1 ORIGIN.X RN3.2 RN3.3 RN3.6 RN3.7 U3.4

## Keep-outs
Keep-Out Layer:
  lines w10: 807.98,159.37 ccw(c847.35,159.37) 847.35,120 3368.61,120 ccw(c3368.61,159.37) 3407.98,159.37 3407.98,220 3507.98,320 3507.98,1610 3407.98,1710 3407.98,2160 3347.98,2220 847.35,2220 ccw(c847.35,2180.63) 807.98,2180.63 807.98,159.37

## Other copper
Top Layer:
  drawing of 12978 lines, arcs and shapes, not listed
Bottom Layer:
  text "30" at 1632.98,1720 h50
  text "2011-REV3" at 865.42,1079.14 h40 r270

## Silkscreen, mask and mechanical layers (free items; w line width, h text height)
Top Overlay:
  circle w12: c932.98,195 r15.81
  lines w2: 1870.48,239.02 1870.48,239.02
  lines w12: 832.98,170 882.98,170 ; 857.98,145 857.98,195 ; 882.98,195 932.98,195 ; 932.98,155 ccw(c932.98,195) 972.98,195 ; 932.98,235 cw(c932.98,195) 972.98,195 ; 1007.98,170 1057.98,170 ; 1007.98,195 972.98,195 ; 1907.98,1915 1927.98,1895 2322.98,1895 ; 2032.98,2370 2032.98,2520 2707.98,2520 2707.98,2370 ; 2132.98,2370 2132.98,2420 2257.98,2420 2257.98,2370 ; 2742.98,1895 3137.98,1895 3157.98,1915 ; 3187.98,1940 3207.98,1960 3227.98,1940 3197.98,1940 3212.98,1950 ; 3292.98,1965 3332.98,1965 3312.98,1945 3297.98,1960 3317.98,1960 ; 3312.98,1950 3312.98,1955 ; 3172.98,1935 3207.98,1970 3242.98,1935 3172.98,1935 ; 3277.98,1970 3312.98,1935 3347.98,1970 3277.98,1970
  text "PWM COMPL1" at 2082.98,2545 h50
  text "PWM COMPL2" at 2082.98,2445 h50
  text "SCL" at 1581.81,2249.48 h56 r90
  text "SDA" at 1691.81,2244.48 h56 r90
  text "A11" at 2062.5,2238.06 h40 r90
  text "A10" at 2262.5,2238.06 h40 r90
  text "A9" at 2362.5,2238.06 h40 r90
  text "A8" at 2462.5,2238.06 h40 r90
  text "(AIN0)" at 2637.5,2238.06 h40 r90
  text "A7" at 2737.5,2238.06 h40 r90
  text "A6" at 2912.5,2238.06 h40 r90
  text "Prototype" at 3921.48,2207 h50 r180
  text "M.Banzi" at 787.98,2195 h45 r180
  text "Limited" at 3900.23,2141 h50 r180
  text "D.Cuartielles" at 784.98,2120 h45 r180
  text "T.Igoe" at 784.98,2060 h45 r180
  text "Edition" at 3849.98,2059.75 h50 r180
  text "13" at 1917.98,2050 h50 r270
  text "12" at 2017.98,2050 h50 r270
  text "11" at 2117.98,2050 h50 r270
  text "10" at 2217.98,2050 h50 r270
  text "9" at 2317.98,2050 h50 r270
  text "8" at 2417.98,2050 h50 r270
  text "7" at 2577.98,2050 h50 r270
  text "6" at 2677.98,2050 h50 r270
  text "5" at 2777.98,2050 h50 r270
  text "4" at 2877.98,2050 h50 r270
  text "3" at 2977.98,2050 h50 r270
  text "2" at 3077.98,2050 h50 r270
  text "1" at 3177.98,2050 h50 r270
  text "0" at 3277.98,2050 h50 r270
  text "G.Martino" at 784.98,1995 h45 r180
  text "#" at 3037.98,1960 h44 r90
  text "#" at 2367.98,1955 h44 r90
  text "#" at 2732.98,1955 h44 r90
  text "#" at 2832.98,1955 h44 r90
  text "D.Mellis" at 784.98,1930 h45 r180
  text "GND" at 1867.23,1910.48 h56 r90
  text "#" at 1972.98,1910 h44 r90
  text "#" at 2172.98,1910 h44 r90
  text "#" at 2267.98,1910 h44 r90
  text "DIGITAL" at 2349.41,1868.59 h66
  text "AREF" at 1771.81,1859.48 h56 r90
  text "[#=PWM]" at 2392.98,1810 h44
  text "TX1" at 3237.81,1780.48 h56 r90
  text "RX1" at 3337.98,1780 h56 r90
  text "TM" at 2587.98,1730 h40
  text "Arduino" at 2102.98,1670 h86
  text "LEONARDO" at 2047.98,1570 h86
  text "www.arduino.cc" at 1988.84,1492.44 h66
  text "1" at 3294.26,1373.91 h50
  text "+VIN" at 832.98,620 h50
  text "-" at 1407.98,590 h50
  text "ANALOG IN" at 2797.98,360 h66
  text "5V" at 2338.5,290.33 h56 r90
  text "GND" at 2438.5,290.33 h56 r90
  text "GND" at 2538.5,290.33 h56 r90
  text "VIN" at 2638.5,290.33 h56 r90
  text "A0" at 2776.04,290.48 h40
  text "A1" at 2876.04,290.48 h40
  text "A2" at 2976.04,290.48 h40
  text "A3" at 3076.04,290.48 h40
  text "A4" at 3176.04,290.48 h40
  text "A5" at 3276.04,290.48 h40
  text "IOREF" at 2036.81,289.48 h56 r90
  text "RST" at 2136.81,289.48 h56 r90
  text "3V3" at 2236.81,289.48 h56 r90
Bottom Overlay:
  text "MADE IN" at 2957.98,1870 h56
  text "ITALY" at 2907.98,1795 h56
Mechanical 2:
  text "X2" at 812.98,510 h50

## Text inside footprints (layer, text, board x,y; h text height)
Designator1: Top Overlay "PCB" at 814.98,1430 h40 r270
IC1: Top Overlay "2" at 1628.35,744.19 h32 r90; Top Overlay "1" at 1627.98,659.07 h32 r90; Top Overlay "4" at 1357.98,870 h32 r90; Top Overlay "3" at 1627.98,835.19 h32 r90